# Allegro board gumstix_breakout - Copy.brd
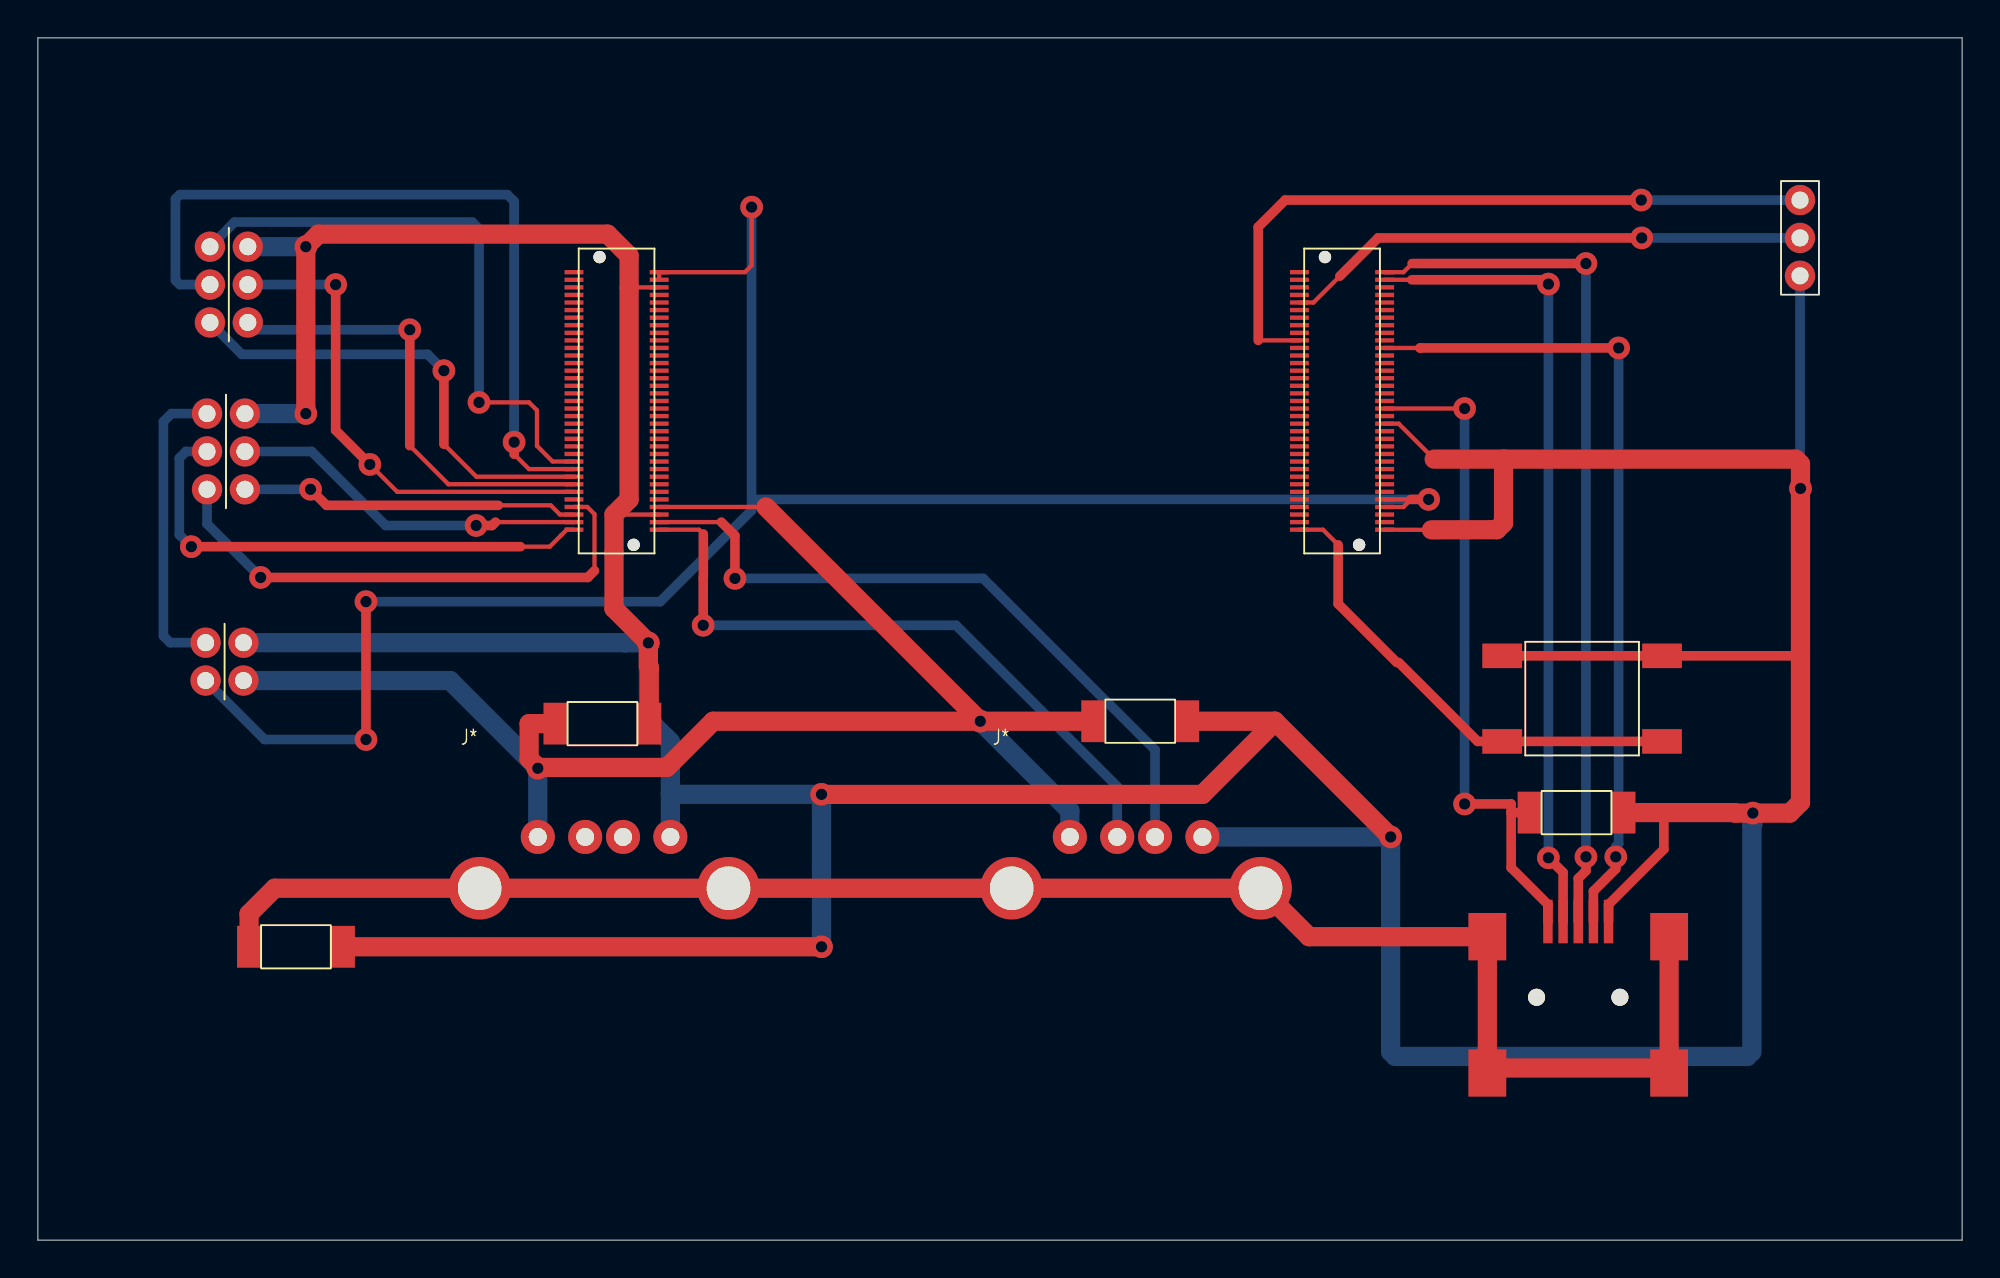
[diagram p0: board, top side]
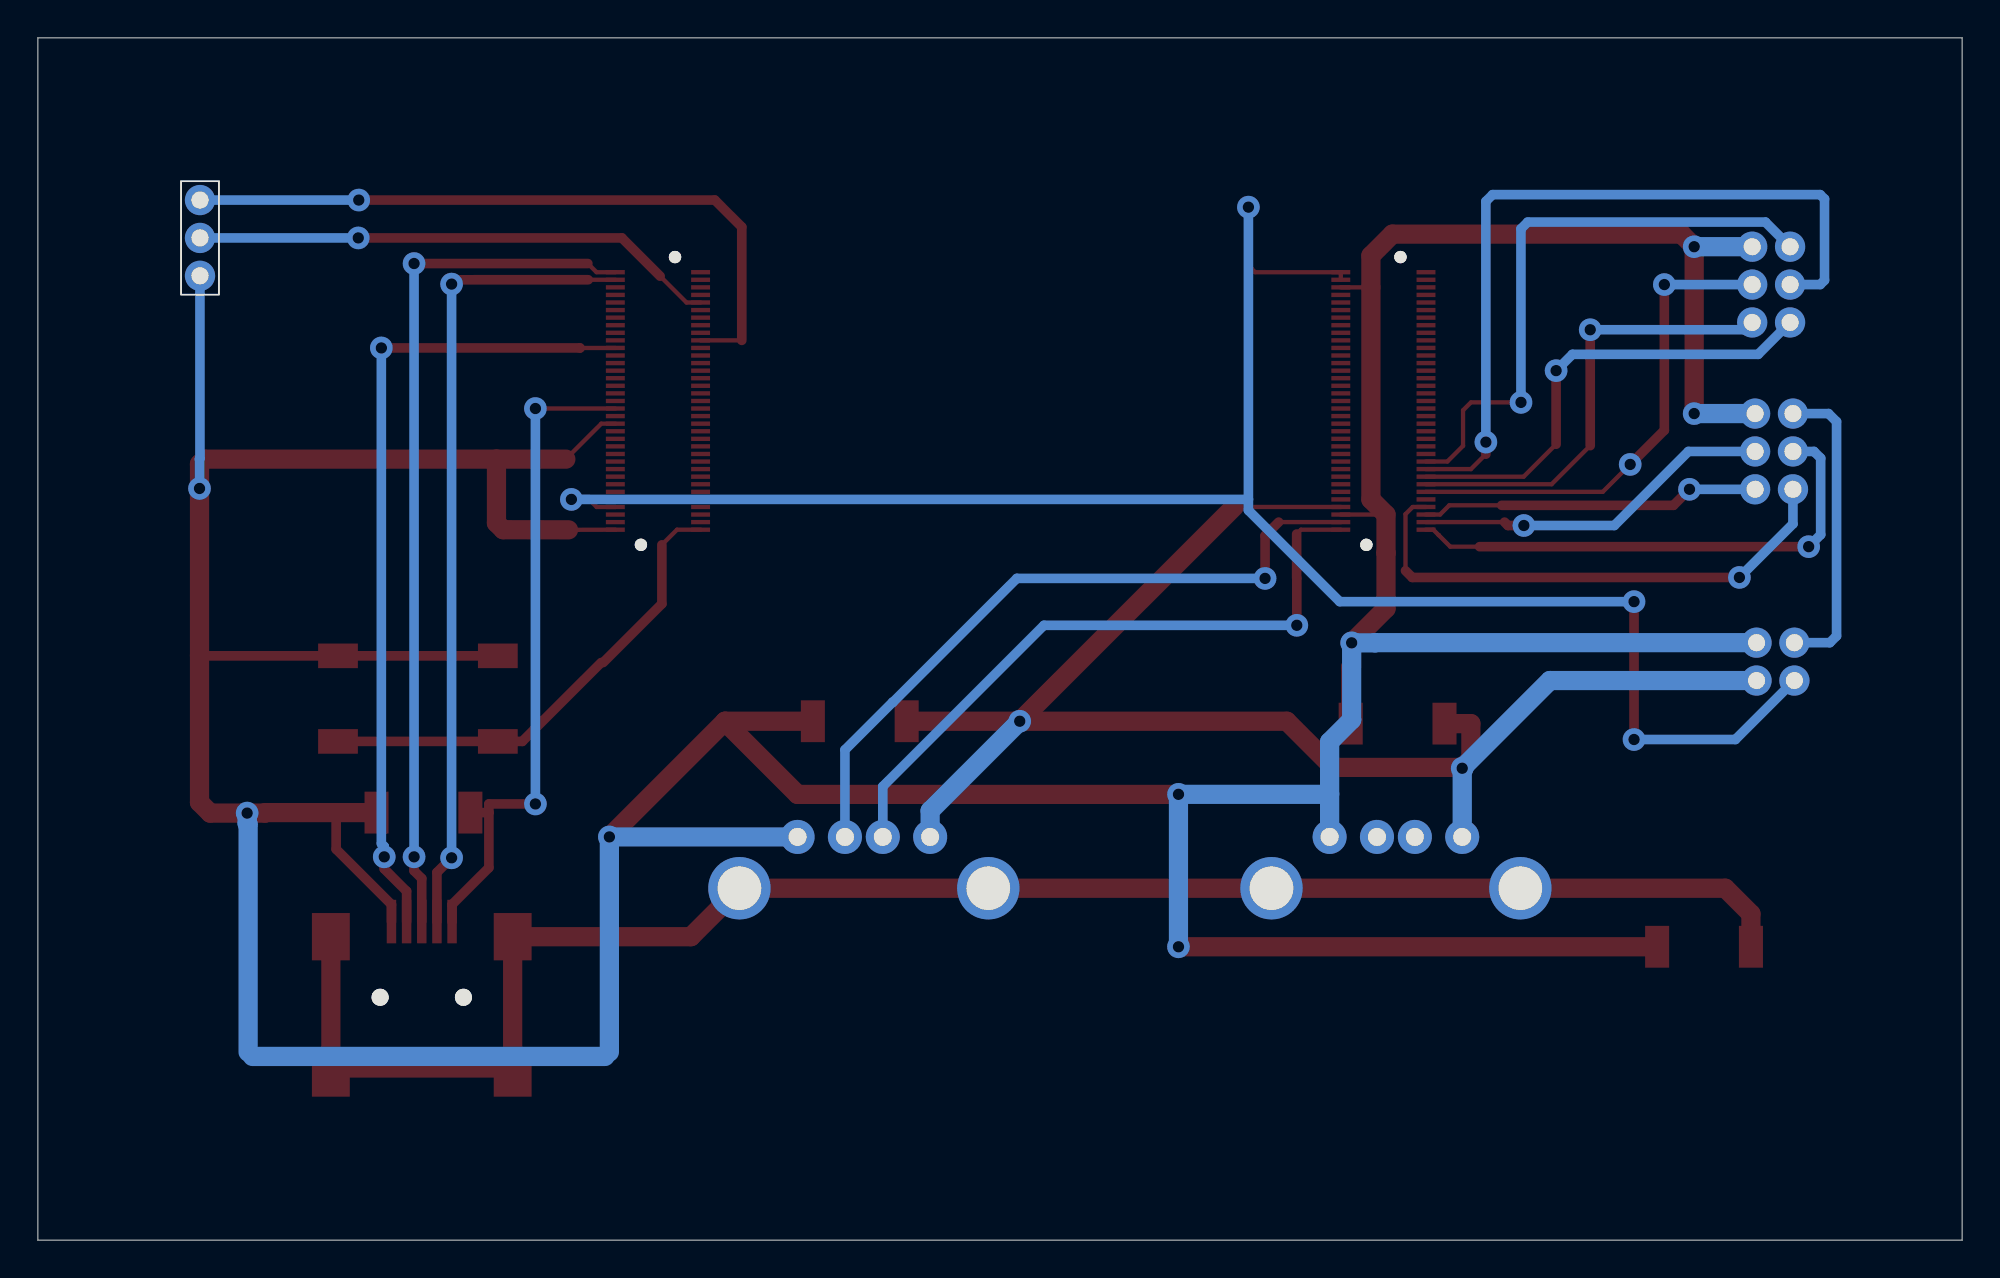
[diagram p1: board, bottom side, seen from below]

Outline 101.6 x 63.5 mm; copper layers: TOP, BOTTOM. Coordinates in mm from the lower left corner of the outline.
Outline path: 0,63.5 101.6,63.5 101.6,0 0,0 0,63.5

## Placement (name value [footprint] x y rotation side)
C1  1n  [SMDCAP]  13.69 15.49 0 top
C2  4.7u  [SMDCAP]  58.14 27.41 180 top
C3  4.7u  [SMDCAP]  29.74 27.28 180 top
C4  4.7u  [SMDCAP]  81.18 22.58 180 top
J1  GUMSTIX_J4  [GUMSTIX]  30.56 44.32 0 top
J2  GUMSTIX_J1  [GUMSTIX]  68.86 44.32 180 top
J3  CON6  [USBA]  57.99 14.05 0 top
J4  CON6  [USBA]  29.9 14.05 0 top
J5  CON9  [MUSBA_TSMT]  81.33 12.83 90 top
J6  CON6  [DIP6_CONN]  10.08 50.47 0 top
J7  CON3  [DIP3]  93.04 52.93 0 top
J8  CON6  [DIP6_CONN]  9.93 41.66 0 top
J9  CON4  [DIP4_CONN]  9.86 30.56 0 top
S1  -  [SWITCH]  81.53 28.6 0 top

## Library data of the parts
C1-C4 = C_elect_0: Tolerance: ***; User Part Number: ***
J1 = GUMSTIX_J4
J2 = GUMSTIX_J1
J3 J4 J6 J8 = CON6
J5 = CON9
J7 = CON3
J9 = CON4
S1 = SWITCH

## Footprints (pads in the part's own frame, mm; a bottom-side part is the same pattern mirrored in y, then rotated)
DIP3
  round 1.6 hole 0.9: 1(0,2) 2(0,0) 3(0,-2)
DIP4_CONN
  round 1.6 hole 0.9: 1(-1,1) 2(-1,-1) 3(1,-1) 4(1,1)
DIP6_CONN
  round 1.6 hole 0.9: 1(-1,2) 2(-1,0) 3(-1,-2) 4(1,-2) 5(1,0) 6(1,2)
GUMSTIX
  round 0.65 hole 0.65 unplated: (-0.9,7.6) (0.9,-7.6)
  rect 1x0.23 smd: 1(2.25,6.8) 2(2.25,6.4) 3(2.25,6) 4(2.25,5.6) 5(2.25,5.2) 6(2.25,4.8) 7(2.25,4.4) 8(2.25,4) 9(2.25,3.6) 10(2.25,3.2) 11(2.25,2.8) 12(2.25,2.4) 13(2.25,2) 14(2.25,1.6) 15(2.25,1.2) 16(2.25,0.8) 17(2.25,0.4) 18(2.25,0) 19(2.25,-0.4) 20(2.25,-0.8) 21(2.25,-1.2) 22(2.25,-1.6) 23(2.25,-2) 24(2.25,-2.4) 25(2.25,-2.8) 26(2.25,-3.2) 27(2.25,-3.6) 28(2.25,-4) 29(2.25,-4.4) 30(2.25,-4.8) 31(2.25,-5.2) 32(2.25,-5.6) 33(2.25,-6) 34(2.25,-6.4) 35(2.25,-6.8) 36(-2.25,-6.8) 37(-2.25,-6.4) 38(-2.25,-6) 39(-2.25,-5.6) 40(-2.25,-5.2) 41(-2.25,-4.8) 42(-2.25,-4.4) 43(-2.25,-4) 44(-2.25,-3.6) 45(-2.25,-3.2) 46(-2.25,-2.8) 47(-2.25,-2.4) 48(-2.25,-2) 49(-2.25,-1.6) 50(-2.25,-1.2) 51(-2.25,-0.8) 52(-2.25,-0.4) 53(-2.25,0) 54(-2.25,0.4) 55(-2.25,0.8) 56(-2.25,1.2) 57(-2.25,1.6) 58(-2.25,2) 59(-2.25,2.4) 60(-2.25,2.8) 61(-2.25,3.2) 62(-2.25,3.6) 63(-2.25,4) 64(-2.25,4.4) 65(-2.25,4.8) 66(-2.25,5.2) 67(-2.25,5.6) 68(-2.25,6) 69(-2.25,6.4) 70(-2.25,6.8)
MUSBA_TSMT
  round 0.9 hole 0.9 unplated: (0,2.2) (0,-2.2)
  rect 2.3x0.5 smd: 1(4,1.6) 2(4,0.8) 3(4,0) 4(4,-0.8) 5(4,-1.6)
  rect 2.5x2 smd: 6(-4,4.8) 7(-4,-4.8) 8(3.2,-4.8) 9(3.2,4.8)
SMDCAP
  rect 1.27x2.21 smd: 1(-2.54,0) 2(2.413,0)
SWITCH
  rect 2.1x1.3 smd: 1(-4.22,2.26) 2(4.22,2.26) 3(4.22,-2.26) 4(-4.22,-2.26)
USBA
  round 3.3 hole 2.3 unplated: (-6.57,4.54) (6.57,4.54)
  round 1.8 hole 0.95 unplated: (-3.5,7.25) (-1,7.25) (1,7.25) (3.5,7.25)

## Nets
GND: C1.2(-) C2.1(+) C3.1(+) C4.1(+) J1.3(GND#3) J1.33(GND#33) J2.56(GND#56) J2.70(GND#70) J5.5 J6.6 J7.3 J8.6 J9.4 S1.1 S1.2
VCC_1.8: J8.1 J9.1
VCC_3.3: J1.1(VSYSTEM#1) J1.2(VSYSTEM#2) J2.66(VSYSTEM#66) J2.67(VSYSTEM#67) J9.2
COMMON_SHIELD: C1.1(+) J5.6 J5.7 J5.8 J5.9
GPIO18: J1.38(GPIO23_MMC3_DAT5) J8.4
GPIO19: J1.36(GPIO19_MMC3_D1) J8.2
GPIO20: J1.39(GPIO20_MMC3_D2) J8.3
GPIO21: J1.37(GPIO22_MMC3_DAT6) J8.5
GPIO165_IR_RXD3: J2.31(GPIO165_IR_RXD3) J7.2
GPIO166_IR_TXD3: J2.26(GPIO166_IR_TXD3) J7.1
SPI_CLOCK_1.8V: J1.43(GPIO171_SPI1_CLK) J6.3
SPI_CS_1.8V: J1.42(GPIO175_SPI1_CS1) J6.4
SPI_INTERRUPT_1.8V: J1.41(GPIO114_SPI1_NIRQ) J6.5
SPI_MISO_1.8V: J1.45(GPIO173_SPI1_MISO) J6.1
SPI_MOSI_1.8V: J1.44(GPIO172_SPI1_MOSI) J6.2
USB_OTG_DM: J2.37(USBOTG_DM) J5.2
USB_OTG_DP: J2.36(USBOTG_DP) J5.3
USB_OTG_ID: J2.46(USBOTG_ID) J5.4
USB_OTG_VBUS: C4.2(-) J2.54(USBOTG_VBUS) J5.1
USBH_DM: J1.35(USBH_DM)
USBH_DP: J1.34(USBH_DP)
USBH_VBUS: C2.2(-) C3.2(-) J1.32(USBH_VBUS) J9.3
N00742: J2.1(NRESPWRON) S1.3 S1.4

Pads without a net: J1 4 5 6 7 8 9 10 11 12 13 14 15 16 17 18 19 20 21 22 23 24 25 26 27 28 29 30 31 40 46 47 48 49 50 51 52 53 54 55 56 57 58 59 60 61 62 63 64 65 66 67 68 69 70; J2 2 3 4 5 6 7 8 9 10 11 12 13 14 15 16 17 18 19 20 21 22 23 24 25 27 28 29 30 32 33 34 35 38 39 40 41 42 43 44 45 47 48 49 50 51 52 53 55 57 58 59 60 61 62 63 64 65 68 69

## Via types
v1: diameter 1.2, hole 0.6, TOP to BOTTOM, 36 vias

## Routing (per net, layer and track width the routed paths; a pad name or vN(x,y) marks a point on that pad's centre or on a via; arc(x,y) is an arc through that point)
GND: length 322.3
  TOP w0.229: 30.42,38.32 J1.33 ; J2.56 71.85,43.12 73.72,41.25 ; 31.22,50.32 J1.3 ; 93.04,30.86 93.07,30.89 ; 73.58,37.52 J2.70
  TOP w0.508: J5.5 82.93,17.73 85.85,20.65 85.85,22.58 ; S1.1 S1.2 93.04,30.86
  TOP w1.016: C2.1 65.31,27.41 ; 65.31,27.41 65.31,27.37 61.49,23.54 41.37,23.54 v1(41.38,23.55) ; 65.31,27.41 v1(71.42,21.3) ; 77.39,41.25 92.81,41.25 93.07,40.99 v1(93.07,39.7) 93.07,23.12 92.5,22.56 v1(90.55,22.56) 89.61,22.56 89.59,22.58 C4.1 ; 77.39,41.25 77.39,37.88 77.03,37.52 73.58,37.52 ; 77.39,41.25 73.72,41.25 ; v1(14.15,43.66) v1(14.15,52.47) 14.81,53.13 30.08,53.13 31.22,52 31.22,39.12 30.42,38.32 30.42,36.29 30.42,33.36 v1(32.23,31.55) 32.23,30.31 32.28,30.26 C3.1 ; C1.2 v1(41.38,15.49)
  BOTTOM w0.229: 71.42,9.93 71.65,9.7 ; 90.27,9.7 90.5,9.93
  BOTTOM w0.508: v1(93.07,39.7) 93.07,41.27 93.04,41.29 J7.3
  BOTTOM w1.016: 33.4,21.3 33.4,23.56 ; 33.4,23.56 33.4,26.32 32.23,27.48 v1(32.23,31.55) 31,31.55 30.99,31.56 J9.4 ; 33.4,23.56 33.41,23.55 v1(41.38,23.55) v1(41.38,15.49) ; J6.6 v1(14.15,52.47) ; 71.42,9.93 v1(71.42,21.3) 61.49,21.3 ; J8.6 v1(14.15,43.66) ; 71.65,9.7 90.27,9.7 ; 90.5,9.93 90.5,21.96 90.55,22.01 v1(90.55,22.56)
VCC_1.8: length 16.2
  BOTTOM w0.508: J9.1 6.98,31.56 6.63,31.91 6.63,43.23 7.05,43.66 J8.1
VCC_3.3: length 103.5
  TOP w0.229: v1(37.68,54.56) 37.68,51.48 37.33,51.12 J1.1 J1.2 ; J2.67 72.1,38.72 72.5,39.12 J2.66
  TOP w0.508: v1(17.32,33.72) v1(17.32,26.44) ; 72.5,39.12 v1(73.43,39.12)
  BOTTOM w0.508: v1(17.32,26.44) 11.97,26.44 J9.2 ; v1(37.68,54.56) 37.68,39.12 ; 37.68,39.12 37.68,38.55 32.86,33.72 v1(17.32,33.72) ; 37.68,39.12 v1(73.43,39.12)
COMMON_SHIELD: length 92.9
  TOP w1.016: 86.13,9.09 76.8,9.09 J5.6 J5.9 67.12,16.03 64.56,18.59 12.5,18.59 11.15,17.23 C1.1 ; 86.13,9.09 J5.8 ; 86.13,9.09 J5.7
GPIO18: length 17.9
  TOP w0.229: 24.31,38.81 27.08,38.81 27.56,38.32 J1.38
  TOP w0.508: 24.31,38.81 15.24,38.81 v1(14.4,39.66)
  BOTTOM w0.508: v1(14.4,39.66) J8.4
GPIO19: length 27.1
  TOP w0.229: J1.36 27.92,37.52 27.64,37.24 27.64,37.24 27.03,36.63 25.48,36.63
  TOP w0.508: v1(8.1,36.63) 25.48,36.63
  BOTTOM w0.508: v1(8.1,36.63) 7.47,37.26 7.47,41.3 7.82,41.66 J8.2
GPIO20: length 27.8
  TOP w0.229: J1.39 29.01,38.72 29.39,38.34 29.39,35.36
  TOP w0.508: 29.39,35.36 29.03,35 v1(11.76,35)
  BOTTOM w0.508: v1(11.76,35) 8.93,37.83 J8.3
GPIO21: length 19.1
  TOP w0.229: J1.37 24.16,37.92
  TOP w0.508: v1(23.14,37.74) 23.98,37.74 24.16,37.92
  BOTTOM w0.508: v1(23.14,37.74) 18.36,37.74 14.45,41.66 J8.5
GPIO165_IR_RXD3: length 27.8
  TOP w0.229: J2.31 67.35,49.52 68.74,50.91 68.74,50.91
  TOP w0.508: 68.74,50.91 70.76,52.93 v1(84.68,52.93)
  BOTTOM w0.508: v1(84.68,52.93) J7.2
GPIO166_IR_TXD3: length 37.4
  TOP w0.229: 64.43,47.52 J2.26
  TOP w0.508: v1(84.66,54.93) 65.86,54.93 64.43,53.51 64.43,47.52
  BOTTOM w0.508: v1(84.66,54.93) J7.1
SPI_CLOCK_1.8V: length 24.9
  TOP w0.229: 21.44,42.04 23.15,40.32 J1.43
  TOP w0.508: 21.44,42.04 v1(21.44,45.92)
  BOTTOM w0.508: v1(21.44,45.92) 20.58,46.79 10.77,46.79 J6.3
SPI_CS_1.8V: length 24.3
  TOP w0.229: J1.42 21.68,39.92 19.64,41.96
  TOP w0.508: 19.64,41.96 v1(19.64,48.08)
  BOTTOM w0.508: J6.4 11.47,48.08 v1(19.64,48.08)
SPI_INTERRUPT_1.8V: length 26.3
  TOP w0.229: v1(17.53,40.97) 18.97,39.52 J1.41
  TOP w0.508: v1(17.53,40.97) 15.72,42.77 v1(15.72,50.47)
  BOTTOM w0.508: J6.5 v1(15.72,50.47)
SPI_MISO_1.8V: length 31.5
  TOP w0.229: J1.45 27.18,41.12 26.35,41.95 26.35,43.83 25.93,44.25 v1(23.29,44.25)
  BOTTOM w0.508: J6.1 10.38,53.77 22.94,53.77 23.29,53.41 v1(23.29,44.25)
SPI_MOSI_1.8V: length 41.2
  TOP w0.229: 25.15,41.51 25.93,40.72 J1.44
  TOP w0.508: v1(25.15,42.15) 25.15,41.51
  BOTTOM w0.508: J6.2 7.49,50.47 7.26,50.7 7.26,54.99 7.49,55.22 24.79,55.22 25.15,54.86 v1(25.15,42.15)
USB_OTG_DM: length 42.7
  TOP w0.229: J2.37 72.54,50.72
  TOP w0.508: 72.54,50.72 79.53,50.72 v1(79.76,50.5) ; v1(79.76,20.19) 80.53,19.42 J5.2
  BOTTOM w0.508: v1(79.76,50.5) v1(79.76,20.19)
USB_OTG_DP: length 45.7
  TOP w0.229: J2.36 72.1,51.12 72.56,51.58
  TOP w0.508: J5.3 81.33,19.1 81.74,19.51 v1(81.74,20.24) ; 72.56,51.58 v1(81.74,51.58)
  BOTTOM w0.508: v1(81.74,51.58) v1(81.74,20.24)
USB_OTG_ID: length 43.2
  TOP w0.229: 72.97,47.12 72.97,47.12 J2.46
  TOP w0.508: v1(83.31,20.24) 83.31,19.61 82.13,18.43 J5.4 ; 72.97,47.12 72.98,47.12 v1(83.46,47.12)
  BOTTOM w0.508: v1(83.46,47.12) 83.46,20.94 83.31,20.79 v1(83.31,20.24)
USB_OTG_VBUS: length 35.6
  TOP w0.229: J2.54 v1(75.33,43.92)
  TOP w0.508: C4.2 77.79,22.58 ; 77.79,22.58 77.79,23.04 v1(75.33,23.04) ; 77.79,22.58 77.79,19.67 79.73,17.73 J5.1
  BOTTOM w0.508: v1(75.33,43.92) v1(75.33,23.04)
USBH_DM: length 35.3
  TOP w0.229: J1.35 34.91,37.52 35.14,37.29 ; 35.14,34.96 35.13,34.95
  TOP w0.508: 35.14,37.29 35.14,34.96 ; 35.13,34.95 v1(35.13,32.47)
  BOTTOM w0.508: v1(35.13,32.47) 48.48,32.47 56.99,23.96 56.99,21.3
USBH_DP: length 37.1
  TOP w0.229: 36.09,37.92 J1.34
  TOP w0.508: 36.09,37.92 36.8,37.2 v1(36.8,34.95)
  BOTTOM w0.508: v1(36.8,34.95) 49.91,34.95 56.45,28.41 56.47,28.41 58.99,25.89 58.99,21.3
USBH_VBUS: length 85.1
  TOP w0.229: J1.32 38.44,38.72
  TOP w1.016: 38.44,38.72 v1(49.76,27.41) ; v1(49.76,27.41) 35.66,27.41 33.22,24.97 26.4,24.97 ; v1(49.76,27.41) C2.2 ; 26.4,24.97 v1(26.4,24.92) ; 26.4,24.97 25.94,25.43 25.94,27.28 C3.2
  BOTTOM w1.016: v1(49.76,27.41) 54.49,22.68 54.49,21.3 ; 26.4,21.3 v1(26.4,24.92) 21.76,29.56 J9.3
N00742: length 25.6
  TOP w0.229: J2.1 67.85,37.52 68.65,36.72 ; 71.86,30.51 71.75,30.51
  TOP w0.508: 71.75,30.51 68.65,33.61 68.65,36.72 ; 71.86,30.51 76.02,26.34 S1.4 S1.3
